# EAGLE board PR5003 (EAGLE 6.5.0)
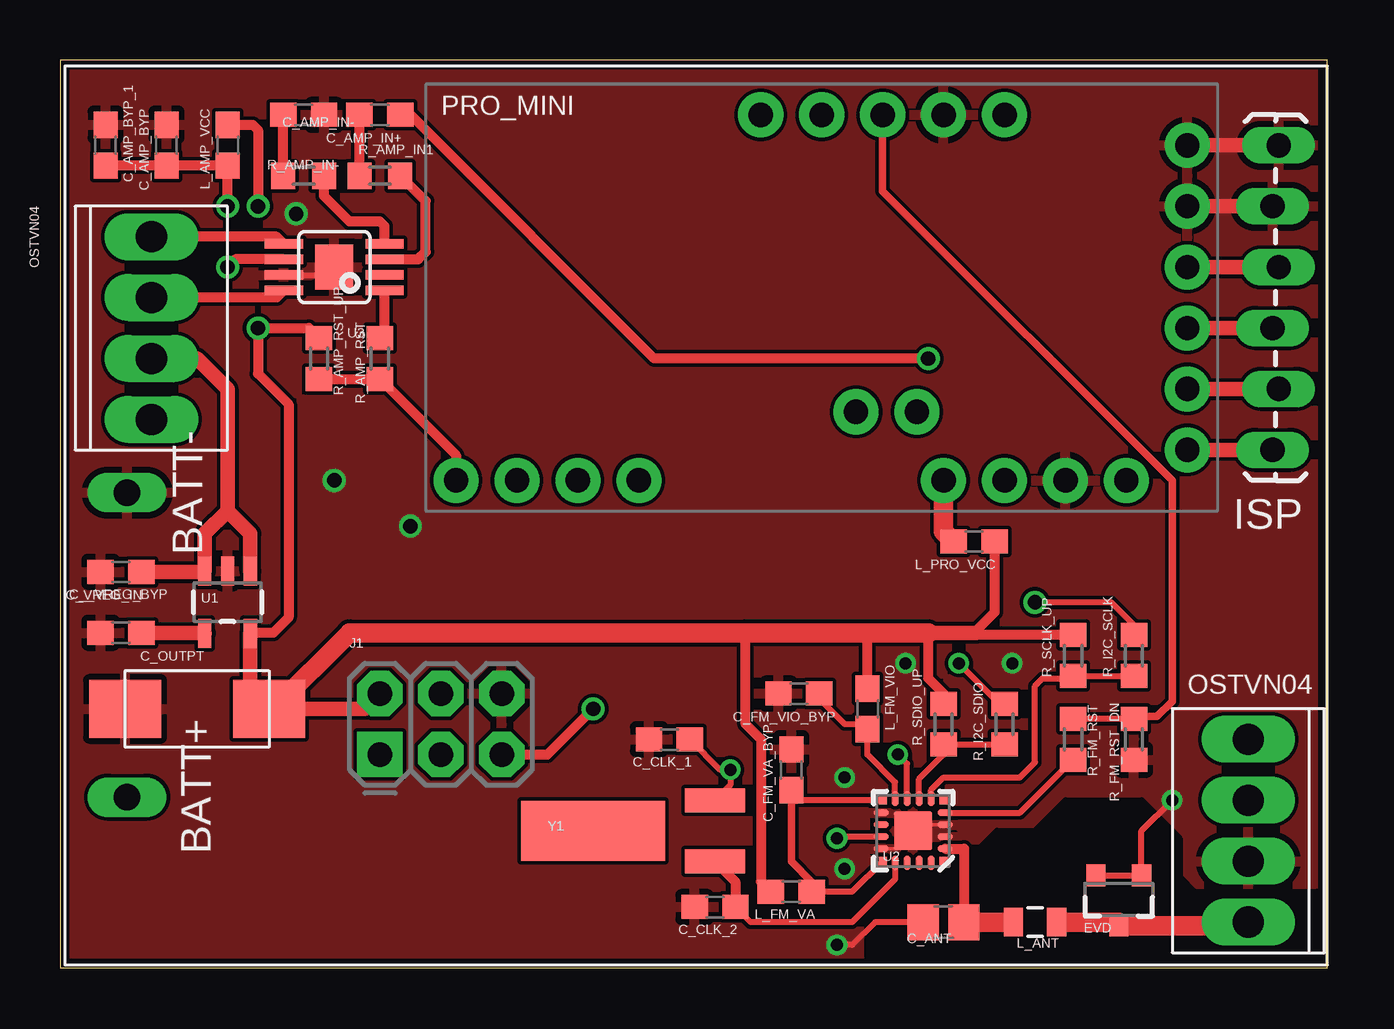
[diagram p0: board, top side]
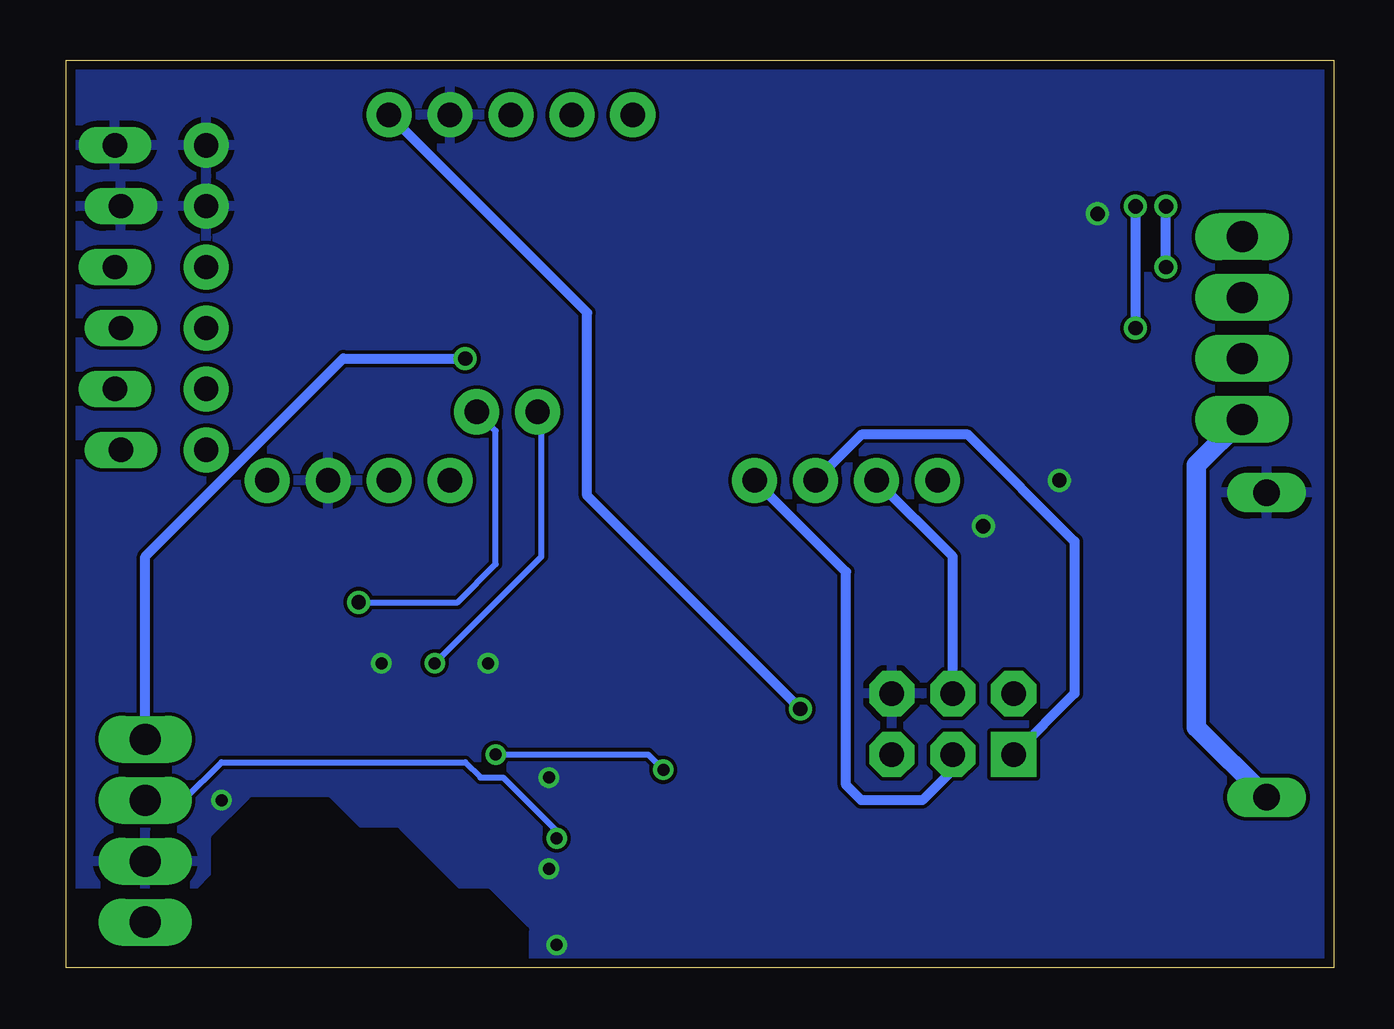
[diagram p1: board, bottom side, seen from below]

Size 52.83 x 37.85 mm. Coordinates in mm from the lower left corner, seen from the top.
Outline: 0,0 52.83,0 52.83,37.85 0,37.85 0,0
Copper layers (1*16): Top 0.0356mm / dielectric 1.5011mm / Bottom 0.0356mm
Design rules "LaenPCBOrder": minimum track width 6mil, minimum drill 13mil, track to track 6mil, track to pad 6mil, pad to pad 6mil, via to via 6mil, smd to smd 6mil, copper to edge 15mil, drill to drill 6mil, minimum pad ring 7mil, minimum via ring 7mil, stop-mask expansion 3mil, vias tented up to drill 0mil, thermal gap 10mil
Net classes: 1 GND: width 0.61 mm
tRestrict: area 33.7,0 to 52.4,7
bRestrict: area 33.7,0 to 52.4,7

## Footprints (pad centres in the part's own frame; a part is rotated, then mirrored left to right if it is on the bottom)
OSTVN04 = drill 1.3 pad 1.778 long: P$1 -3.81,0; P$2 -1.27,0; P$3 1.27,0; P$4 3.81,0
KEYSTONE_2479_3XAAA_BOTTOM = drill 1.1 long: BATT+ 0,-6.35; BATT- 0,6.35
C0603 = smd 1.1 x 1: 1 -0.85,0; 2 0.85,0
C0805 = smd 1.3 x 1.5: 1 -0.85,0; 2 0.85,0
VISHAY_TR3C = smd 3 x 2.4: P$1 -3,0; P$2 3,0
SOT23-3 = smd 0.8 x 0.9: 1 -0.95,-1; 2 0.95,-1; 3 0,1.1
1X06_LOCK_LONGPADS = drill 1.016 long: 1 0,0; 2 2.54,-0.254; 3 5.08,0; 4 7.62,-0.254; 5 10.16,0; 6 12.7,-0.254
2X3-NS = drill 1.016 pad 1.88 square: 1 -2.54,-1.27 | drill 1.016 pad 1.88 octagon: 2 -2.54,1.27; 3 0,-1.27; 4 0,1.27; 5 2.54,-1.27; 6 2.54,1.27
0603 = smd 1.1 x 1: 1 -0.85,0; 2 0.85,0
0805 = smd 0.8 x 1.2: 1 -0.9,0; 2 0.9,0
ARDUINO_PRO_MINI = drill 1.016 pad 1.88: 3 -7.62,7.62; 4 -7.62,5.08; 5 -7.62,2.54; 6 -7.62,0; 7 -7.62,-2.54; 13 7.62,-15.24; 14 7.62,-12.7; 15 7.62,-10.16; 16 7.62,-7.62; 21 7.62,5.08; 22 7.62,7.62; 23 7.62,10.16; 24 7.62,12.7; A4 4.763,1.429; A5 4.763,3.969; BLK -6.35,15.24; GND -3.81,15.24; GRN 6.35,15.24; RXI 1.27,15.24; TXO 3.81,15.24; VCC -1.27,15.24
R0603 = smd 1 x 1.1: 1 -0.85,0; 2 0.85,0
SOT23-5 = smd 0.55 x 1.2: 1 -0.95,-1.3; 2 0,-1.3; 3 0.95,-1.3; 4 0.95,1.3; 5 -0.95,1.3
SI470X = smd 0.34 x 0.34: 1 -1.275,1.265; 6 -1.265,-1.265; 11 1.265,-1.265; 16 1.265,1.265 | smd 0.61 x 0.28: 2 -1.335,0.75; 3 -1.335,0.25; 4 -1.335,-0.25; 5 -1.335,-0.75; 12 1.335,-0.75; 13 1.335,-0.25; 14 1.335,0.25; 15 1.335,0.75 | smd 0.28 x 0.61: 7 -0.75,-1.335; 8 -0.25,-1.335; 9 0.25,-1.335; 10 0.75,-1.335; 17 0.75,1.335; 18 0.25,1.335; 19 -0.25,1.335; 20 -0.75,1.335 | smd 1.6 x 1.6: 21 0,0
POWER-SOP8 = smd 0.4 x 1.6: 1 -0.975,-2.1; 2 -0.325,-2.1; 3 0.325,-2.1; 4 0.975,-2.1; 5 0.975,2.1; 6 0.325,2.1; 7 -0.325,2.1; 8 -0.975,2.1 | smd 1.89 x 1.57: 9 0,0
CRYSTAL-32KHZ-SMD = smd 2.5 x 6: SHEILD 0,5.08 | smd 1 x 2.5: X1 -1.27,0; X2 1.27,0

## Placement (x,y rotation side)
ANT/POT_VOL  OSTVN04  [OSTVN04]  49.53,5.71 90 top
ANT/POT_VOL1  OSTVN04  [OSTVN04]  3.81,26.67 270 top
BATT_IN  KEYSTONE_2479_3XAAA_BOTTOM  [KEYSTONE_2479_3XAAA_BOTTOM]  2.79,13.46 0 top
C__VREG_BYP  470pF  [C0603]  2.54,13.97 180 top
C_AMP_BYP  1uF  [C0603]  4.45,34.29 90 top
C_AMP_BYP_1  10uF  [C0603]  1.91,34.29 90 top
C_AMP_IN+  1uF  [C0603]  13.34,35.56 180 top
C_AMP_IN-  1uF  [C0603]  10.16,35.56 180 top
C_ANT  4.7pF  [C0805]  36.83,1.91 180 top
C_CLK_1  22pF  [C0603]  25.4,9.53 180 top
C_CLK_2  22pF  [C0603]  27.3,2.54 180 top
C_FM_VA_BYP  22nF  [C0603]  30.48,8.26 90 top
C_FM_VIO_BYP  100nF  [C0603]  30.8,11.43 180 top
C_OUTPT  2.2uF  [VISHAY_TR3C]  5.71,10.79 180 top
C_VREG_IN  1uF  [C0603]  2.54,16.51 180 top
EVD  MMBZ27VCLT1  [SOT23-3]  44.13,2.86 180 top
ISP  [1X06_LOCK_LONGPADS]  50.8,34.29 270 top
J1  AVR_SPI_PRG_6NS  [2X3-NS]  15.88,10.16 0 top
L_AMP_VCC  [0603]  6.99,34.29 270 top
L_ANT  [0805]  40.64,1.91 0 top
L_FM_VA  [0603]  30.48,3.17 0 top
L_FM_VIO  [0603]  33.66,10.79 270 top
L_PRO_VCC  [0603]  38.1,17.78 180 top
PRO_MINI  ARDUINO_PRO_MINI  [ARDUINO_PRO_MINI]  31.75,27.94 270 top
R_AMP_IN1  59k  [R0603]  13.34,33.02 0 top
R_AMP_IN-  59K  [R0603]  10.16,33.02 0 top
R_AMP_RST  330  [R0603]  13.34,25.4 90 top
R_AMP_RST_UP  10K  [R0603]  10.79,25.4 90 top
R_FM_RST  330  [R0603]  42.23,9.53 270 top
R_FM_RST_DN  10K  [R0603]  44.77,9.53 90 top
R_I2C_SCLK  330  [R0603]  44.77,13.02 270 top
R_I2C_SDIO  330  [R0603]  39.37,10.16 270 top
R_SCLK_UP  4.7K  [R0603]  42.23,13.02 90 top
R_SDIO_UP  4.7K  [R0603]  36.83,10.16 90 top
U1  MIC5219 3.3V  [SOT23-5]  6.99,15.24 180 top
U2  SI470X  [SI470X]  35.56,5.71 180 top
U3  TPA2005D1DGN  [POWER-SOP8]  11.43,29.21 90 top
Y1  32.768KHz  [CRYSTAL-32KHZ-SMD]  27.3,5.71 90 top

## Library data of the parts
ANT/POT_VOL ANT/POT_VOL1 = OSTVN On-Shore Term
BATT_IN = Batteries
C__VREG_BYP C_AMP_BYP C_AMP_BYP_1 C_AMP_IN+ C_AMP_IN- C_ANT C_CLK_1 C_CLK_2 C_FM_VA_BYP C_FM_VIO_BYP C_VREG_IN R_AMP_IN1 R_AMP_IN- R_AMP_RST R_AMP_RST_UP R_FM_RST R_FM_RST_DN R_I2C_SCLK R_I2C_SDIO R_SCLK_UP R_SDIO_UP = resistor
C_OUTPT = capacitor-wima
EVD = SparkFun-DiscreteSemi
ISP J1 = SparkFun-Connectors
L_AMP_VCC L_ANT L_FM_VA L_FM_VIO L_PRO_VCC = SparkFun-Passives
PRO_MINI = Sparkfun_MODIFIED_2
U1 = SparkFun-PowerIC; PROD_ID: VREG-09872
U2 = SparkFun-RF
U3 = SparkFun-AnalogIC
Y1 = SparkFun-FreqCtrl; PROD_ID: XTAL-07894

## Nets
ANT: ANT/POT_VOL.P$1 EVD.3 L_ANT.2
BATT+: ANT/POT_VOL1.P$4 BATT_IN.BATT+
FM_AUD_OUT: ANT/POT_VOL.P$3 U2.14
GND [GND]: ANT/POT_VOL.P$2 BATT_IN.BATT- C__VREG_BYP.2 C_AMP_BYP.2 C_AMP_BYP_1.2 C_AMP_IN-.1 C_ANT.2 C_CLK_1.2 C_CLK_2.2 C_FM_VA_BYP.2 C_FM_VIO_BYP.2 C_OUTPT.P$2 C_VREG_IN.2 EVD.1 EVD.2 ISP.1 ISP.2 J1.6 PRO_MINI.4 PRO_MINI.23 PRO_MINI.BLK PRO_MINI.GND R_FM_RST_DN.1 U1.2 U2.3 U2.4 U2.12 U2.15 U2.21 U3.7 U3.9
N$1: C_AMP_IN-.2 R_AMP_IN-.1
N$2: C_AMP_IN+.2 R_AMP_IN1.1
N$3: C_CLK_1.1 U2.9 Y1.X2
N$4: R_FM_RST.2 U2.5
N$5: PRO_MINI.A5 R_I2C_SCLK.1
N$6: R_I2C_SCLK.2 R_SCLK_UP.1 U2.7
N$7: PRO_MINI.A4 R_I2C_SDIO.1
N$8: J1.1 PRO_MINI.15
N$9: R_I2C_SDIO.2 R_SDIO_UP.1 U2.8
N$10: C_ANT.1 L_ANT.1 U2.2
N$11: C_CLK_2.1 U2.17 Y1.X1
N$12: ISP.6 PRO_MINI.GRN
N$13: ISP.5 PRO_MINI.TXO
N$14: R_AMP_IN1.2 U3.3
N$15: R_AMP_IN-.2 U3.4
N$16: ANT/POT_VOL1.P$2 U3.8
N$17: ANT/POT_VOL1.P$1 U3.5
N$18: ISP.4 PRO_MINI.RXI
N$19: R_AMP_RST.2 U3.1
N$20: ANT/POT_VOL1.P$3 C_VREG_IN.1 U1.1 U1.3
N$21: ISP.3 PRO_MINI.VCC
N$22: J1.5 PRO_MINI.3
N$23: PRO_MINI.5 R_FM_RST.1 R_FM_RST_DN.2
N$24: J1.4 PRO_MINI.14
N$25: PRO_MINI.13 R_AMP_RST.1 R_AMP_RST_UP.1
N$26: J1.3 PRO_MINI.16
N$27: ANT/POT_VOL.P$4 C_AMP_IN+.1
N$28: C__VREG_BYP.1 U1.4
N$29: L_PRO_VCC.2 PRO_MINI.21
N$30: C_FM_VIO_BYP.1 L_FM_VIO.2 U2.10
N$31: C_FM_VA_BYP.1 L_FM_VA.2 U2.11 U2.16
N$33: C_AMP_BYP.1 C_AMP_BYP_1.1 L_AMP_VCC.2 U3.6
VCC: C_OUTPT.P$1 J1.2 L_AMP_VCC.1 L_FM_VA.1 L_FM_VIO.1 L_PRO_VCC.1 R_AMP_RST_UP.2 R_SCLK_UP.2 R_SDIO_UP.2 U1.5

## Tracks (layer width: path | path; a pad name or v marks a point on that pad's centre or on a via)
ANT
  Top 0.813: L_ANT.2 44.13,1.91 EVD.3 49.53,1.76 ANT/POT_VOL.P$1
BATT+
  Bottom 0.813: BATT_IN.BATT+ 5.71,10.03 5.71,20.95 ANT/POT_VOL1.P$4
FM_AUD_OUT  (via drill 0.5)
  Top 0.254: U2.14 32.45,5.46 v32.38,5.4
  Bottom 0.254: v32.38,5.4 32.38,5.71 34.61,7.94 35.56,7.94 36.2,8.57 46.35,8.57 47.94,6.99 ANT/POT_VOL.P$3
GND  (via drill 0.5, 0.6)
  Top 0.152: U2.15 34.81,4.96 arc90 U2.21 arc-90 35.81,5.96 U2.4
  Top 0.254: 9.21,28.89 U3.7 11.43,28.89 U3.9 | C_ANT.2 33.97,1.91 33.02,0.95 v32.38,0.95 | EVD.2 EVD.1 45.08,5.71 v46.35,6.99
  Top 0.61: PRO_MINI.GND ISP.2 | PRO_MINI.BLK ISP.1
  other vias: 11.43,20.32 14.61,18.41 9.84,31.43 32.7,4.13 32.7,7.94 35.24,12.7 39.69,12.7
  pour Bottom: 0,-0.25 52.83,-0.25 52.83,37.85 0,37.85
  pour Top: 0,-0.25 52.83,-0.25 52.83,37.85 0,37.85
N$1
  Top 0.406: R_AMP_IN-.1 C_AMP_IN-.2
N$2
  Top 0.406: R_AMP_IN1.1 C_AMP_IN+.2
N$3  (via drill 0.5)
  Top 0.254: U2.9 35.31,8.51 v34.92,8.89 | Y1.X2 27.94,7.62 v27.94,8.26 27.52,8.26 C_CLK_1.1
  Bottom 0.254: v34.92,8.89 28.57,8.89 v27.94,8.26
N$4
  Top 0.254: U2.5 40.02,6.46 R_FM_RST.2
N$5  (via drill 0.6)
  Top 0.254: R_I2C_SCLK.1 44.77,14.29 43.81,15.24 v40.64,15.24
  Bottom 0.254: PRO_MINI.A5 34.92,22.38 34.92,16.83 36.51,15.24 v40.64,15.24
N$6
  Top 0.254: U2.7 36.31,7.42 36.83,7.94 40.01,7.94 40.64,8.57 40.64,11.75 40.96,12.06 42.12,12.06 R_SCLK_UP.1 R_I2C_SCLK.2
N$7  (via drill 0.5)
  Top 0.254: R_I2C_SDIO.1 39.16,11.01 v37.47,12.7
  Bottom 0.254: v37.47,12.7 33.02,17.14 33.02,23.02 PRO_MINI.A4
N$8
  Bottom 0.406: PRO_MINI.15 19.68,22.23 15.24,22.23 10.79,17.78 10.79,11.43 J1.1
N$9
  Top 0.254: U2.8 35.81,7.87 36.83,8.89 R_SDIO_UP.1 R_I2C_SDIO.2
N$10
  Top 0.406: U2.2 37.68,4.96 C_ANT.1
  Top 0.813: C_ANT.1 L_ANT.1
N$11
  Top 0.254: U2.17 34.81,3.69 33.02,1.91 28.79,1.91 C_CLK_2.1
  Top 0.406: Y1.X1 28.16,3.6 C_CLK_2.1
N$12
  Top 0.61: ISP.6 PRO_MINI.GRN
N$13
  Top 0.61: PRO_MINI.TXO ISP.5
N$14
  Top 0.406: U3.3 14.93,29.54 15.24,29.84 15.24,31.96 R_AMP_IN1.2
N$15
  Top 0.406: U3.4 13.53,30.92 13.34,31.11 12.06,31.11 11.01,32.17 R_AMP_IN-.2
N$16
  Top 0.406: U3.8 9.04,27.94 ANT/POT_VOL1.P$2
N$17
  Top 0.406: U3.5 9.04,30.48 ANT/POT_VOL1.P$1
N$18
  Top 0.61: ISP.4 PRO_MINI.RXI
N$19
  Top 0.406: R_AMP_RST.2 13.53,26.45 U3.1
N$20
  Top 0.61: ANT/POT_VOL1.P$3 5.71,25.4 6.99,24.13 6.99,19.05 | 6.99,19.05 6.04,18.1 U1.3 6,16.51 C_VREG_IN.1 | U1.1 7.93,18.1 6.99,19.05
N$21
  Top 0.61: PRO_MINI.VCC ISP.3
N$22  (via drill 0.6)
  Top 0.406: J1.5 20.32,8.89 v22.23,10.79
  Bottom 0.406: v22.23,10.79 31.11,19.68 31.11,27.3 PRO_MINI.3
N$23
  Top 0.254: R_FM_RST_DN.2 R_FM_RST.1
  Top 0.305: PRO_MINI.5 34.29,32.38 46.35,20.32 46.35,11.11 45.72,10.48 44.87,10.48 R_FM_RST_DN.2
N$24
  Bottom 0.406: J1.4 15.88,17.14 PRO_MINI.14
N$25
  Top 0.406: R_AMP_RST_UP.1 R_AMP_RST.1 16.51,21.38 PRO_MINI.13
N$26
  Bottom 0.406: J1.3 15.88,8.26 17.14,6.99 19.68,6.99 20.32,7.62 20.32,16.51 PRO_MINI.16
N$27  (via drill 0.6)
  Top 0.406: v36.2,25.4 24.77,25.4 14.61,35.56 C_AMP_IN+.1
  Bottom 0.406: ANT/POT_VOL.P$4 49.53,17.14 41.27,25.4 v36.2,25.4
N$28
  Top 0.61: C__VREG_BYP.1 6,13.97 U1.4
N$29
  Top 0.813: PRO_MINI.21 36.83,18.2 L_PRO_VCC.2
N$30
  Top 0.254: U2.10 34.81,7.74 33.66,8.89 L_FM_VIO.2 33.44,10.16 32.7,10.16 31.75,11.11 31.75,11.43 C_FM_VIO_BYP.1
N$31
  Top 0.254: U2.16 33.02,3.17 L_FM_VA.2 | U2.11 30.91,6.98 C_FM_VA_BYP.1
  Top 0.305: L_FM_VA.2 31.33,3.6 30.48,4.45 C_FM_VA_BYP.1 30.69,6.98
N$33  (via drill 0.6)
  Top 0.406: U3.6 7.31,29.54 v6.99,29.21 | v6.99,31.75 L_AMP_VCC.2 C_AMP_BYP.1 C_AMP_BYP_1.1
  Bottom 0.406: v6.99,29.21 v6.99,31.75
VCC  (via drill 0.6)
  Top 0.406: 28.57,13.97 28.57,10.16 29.21,9.53 29.21,3.6 L_FM_VA.1 | L_FM_VIO.1 33.66,13.97 | R_SDIO_UP.2 36.83,11.43 36.2,12.06 36.2,13.97 | L_PRO_VCC.1 38.95,14.82 38.1,13.97 38.2,13.87 R_SCLK_UP.2 | L_AMP_VCC.1 8.04,35.14 8.26,34.92 v8.26,31.75 | U1.5 7.96,13.97 8.89,13.97 9.53,14.61 9.53,23.5 8.26,24.77 v8.26,26.67 10.38,26.67 R_AMP_RST_UP.2
  Top 0.61: 38.1,13.97 36.2,13.97 | U1.5 7.93,11.57 C_OUTPT.P$1 12.7,10.79 J1.2
  Top 0.813: 36.2,13.97 33.66,13.97 28.57,13.97 12.06,13.97 8.89,10.79 C_OUTPT.P$1
  Bottom 0.406: v8.26,31.75 v8.26,26.67